# EAGLE board XPDR_Board_2 (EAGLE 7.2.0)
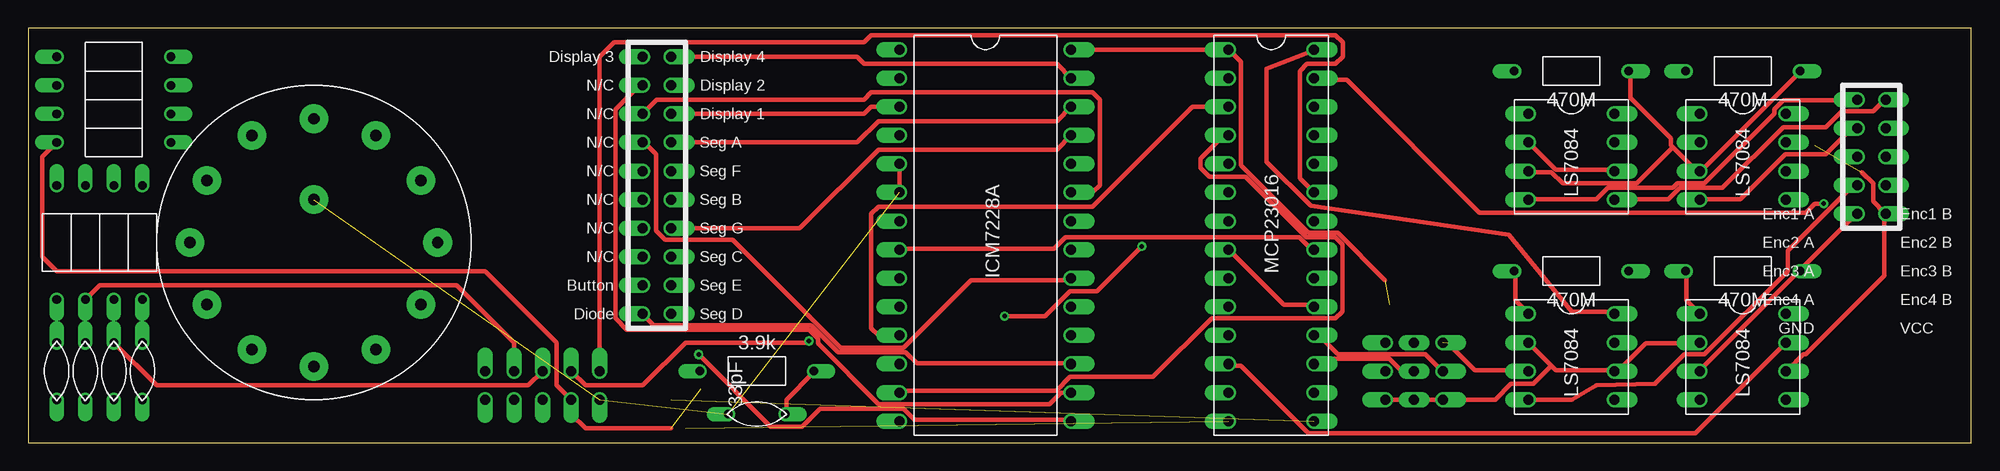
[diagram p0: board, top side]
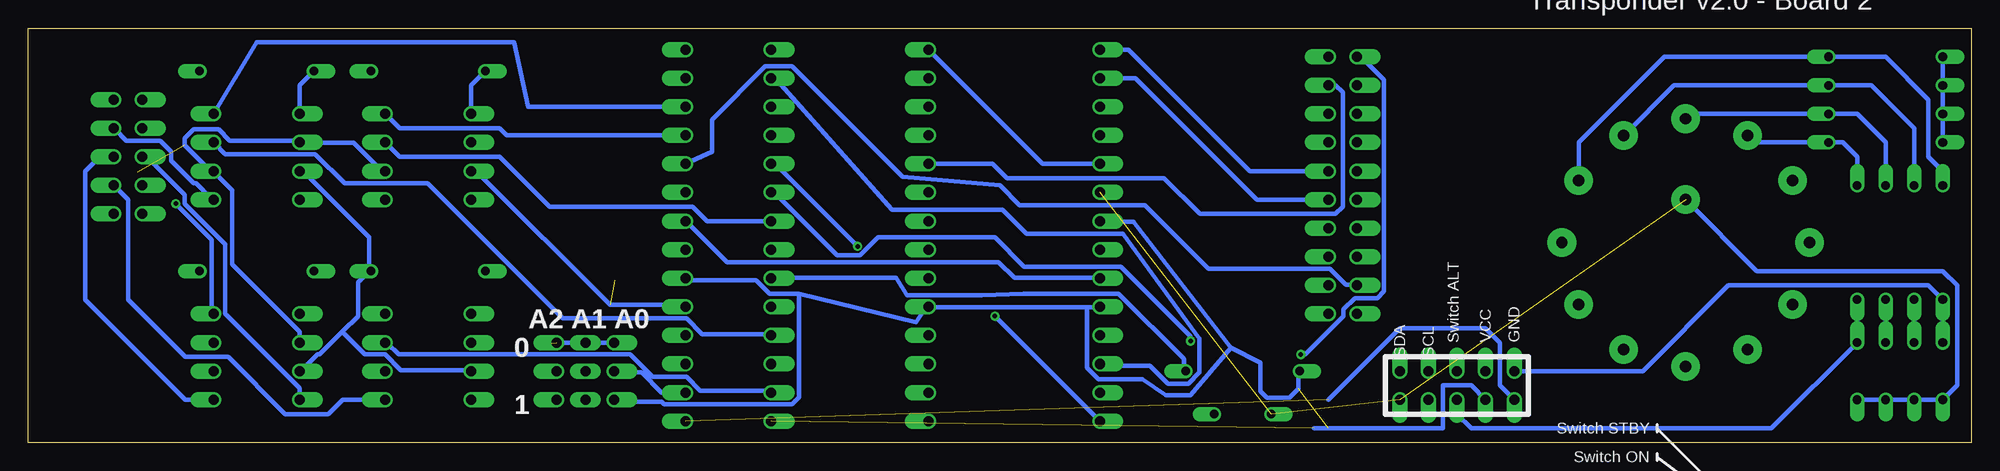
[diagram p1: board, bottom side, seen from below]

Size 172.72 x 36.83 mm. Coordinates in mm from the lower left corner, seen from the top.
Outline: 0,36.83 0,0 172.72,0 172.72,36.83 0,36.83
Copper layers (1*16): Top 0.035mm / dielectric 1.5mm / Bottom 0.035mm
Design rules "RadioStack_v2": minimum track width 0.2mm, minimum drill 0.4mm, track to track 0.2mm, track to pad 0.2mm, pad to pad 0.2mm, via to via 0.2mm, smd to smd 0.2mm, copper to edge 0.5mm, drill to drill 8mil, minimum pad ring 10mil, minimum via ring 8mil, stop-mask expansion 4mil, vias tented up to drill 0mil, thermal gap 10mil

## Footprints (pad centres in the part's own frame; a part is rotated, then mirrored left to right if it is on the bottom)
LS7084 = drill 0.889 pad 1.27 offset: P$1 0,0; P$2 0,-2.54; P$3 0,-5.08; P$4 0,-7.62; P$5 7.62,-7.62; P$6 7.62,-5.08; P$7 7.62,-2.54; P$8 7.62,0
LISTA_2X5 = drill 0.889 pad 1.27 offset: 1 0,0; 2 0,-2.54; 3 0,-5.08; 4 0,-7.62; 5 0,-10.16; 6 2.54,-10.16; 7 2.54,-7.62; 8 2.54,-5.08; 9 2.54,-2.54; 10 2.54,0
ICM7228A = drill 0.889 pad 1.27 offset: P$1 0,0; P$2 0,-2.54 | drill 0.889 offset: P$3 0,-5.08; P$4 0,-7.62; P$5 0,-10.16; P$6 0,-12.7; P$7 0,-15.24; P$8 0,-17.78; P$9 0,-20.32; P$10 0,-22.86; P$11 0,-25.4; P$12 0,-27.94; P$13 0,-30.48; P$14 0,-33.02; P$15 15.24,-33.02; P$16 15.24,-30.48; P$17 15.24,-27.94; P$18 15.24,-25.4; P$19 15.24,-22.86; P$20 15.24,-20.32; P$21 15.24,-17.78; P$22 15.24,-15.24; P$23 15.24,-12.7; P$24 15.24,-10.16; P$25 15.24,-7.62; P$26 15.24,-5.08; P$27 15.24,-2.54; P$28 15.24,0
LISTA_2X10 = drill 0.889 pad 1.27 offset: 1 0,0; 2 0,-2.54; 3 0,-5.08; 4 0,-7.62; 5 0,-10.16; 6 0,-12.7; 7 0,-15.24; 8 0,-17.78; 9 0,-20.32; 10 0,-22.86; 11 2.54,-22.86; 12 2.54,-20.32; 13 2.54,-17.78; 14 2.54,-15.24; 15 2.54,-12.7; 16 2.54,-10.16; 17 2.54,-7.62; 18 2.54,-5.08; 19 2.54,-2.54; 20 2.54,0
REZISTOR = drill 0.762 pad 1.27 offset: P$1 -5.08,0; P$2 5.08,0
MCP23016 = drill 0.889 pad 1.27 offset: A0 7.62,-30.48; A1 7.62,-27.94; A2 7.62,-25.4; CLK 0,-20.32; GP0.0 7.62,-17.78; GP0.1 7.62,-15.24; GP0.2 7.62,-12.7; GP0.3 7.62,-10.16; GP0.4 7.62,-7.62; GP0.5 7.62,-5.08; GP0.6 7.62,-2.54; GP0.7 7.62,0; GP1.0 0,-2.54; GP1.1 0,-5.08; GP1.2 0,-7.62; GP1.3 0,-10.16; GP1.4 0,-15.24; GP1.5 0,-25.4; GP1.6 0,-27.94; GP1.7 0,-30.48; SCL 0,-33.02; SDA 7.62,-33.02; TP 0,-22.86; VDD 7.62,-20.32; VSS1 0,0; VSS2 0,-17.78; VSS3 7.62,-22.86; ~INT 0,-12.7
ADRESA_0..2 = drill 0.889 pad 1.27 offset: P$1 0,0; P$2 0,-2.54; P$3 0,-5.08; P$7 5.08,0; P$8 5.08,-2.54; P$9 5.08,-5.08 | drill 0.889 pad 1.27 long: P$4 2.54,-5.08; P$5 2.54,-2.54; P$6 2.54,0
KONDENZATOR = drill 0.762 pad 1.27 offset: P$1 -2.54,0; P$2 2.54,0
ROTARY_SWITCH = drill 1.016 pad 2.54: 1 5.5,9.5; 2 9.5,5.5; 3 11,0; 4 9.5,-5.5; 5 5.5,-9.5; 6 0,-11; 7 -5.5,-9.5; 8 -9.5,-5.5; 9 -11,0; 10 -9.5,5.5; 11 -5.5,9.5; 12 0,11; A 0,3.81

## Placement (x,y rotation side)
U$1  LS7084  [LS7084]  133.35,29.21 0 top
U$2  LS7084  [LS7084]  148.59,29.21 0 top
U$3  LS7084  [LS7084]  148.59,11.43 0 top
U$4  LS7084  [LS7084]  133.35,11.43 0 top
U$5  LISTA_2X5  [LISTA_2X5]  50.8,3.81 90 bottom
U$6  ICM7228A  [ICM7228A]  77.47,34.92 0 top
U$7  LISTA_2X10  [LISTA_2X10]  54.61,34.29 0 top
U$8  470M  [REZISTOR]  137.16,33.02 180 top
U$9  MCP23016  [MCP23016]  106.68,34.92 0 top
U$10  470M  [REZISTOR]  152.4,33.02 180 top
U$11  ADRESA_0..2  [ADRESA_0..2]  125.73,3.81 180 top
U$12  470M  [REZISTOR]  152.4,15.24 180 top
U$13  470M  [REZISTOR]  137.16,15.24 180 top
U$14  3.9k  [REZISTOR]  64.77,6.35 0 top
U$15  33pF  [KONDENZATOR]  64.77,2.54 180 top
U$16  ROTARY_SWITCH  [ROTARY_SWITCH]  25.4,17.78 0 top
U$17  [REZISTOR]  7.62,26.67 0 top
U$18  [REZISTOR]  7.62,29.21 0 top
U$19  [REZISTOR]  7.62,31.75 0 top
U$20  [REZISTOR]  7.62,34.29 0 top
U$21  [REZISTOR]  10.16,17.78 90 top
U$22  [REZISTOR]  7.62,17.78 90 top
U$23  [REZISTOR]  5.08,17.78 90 top
U$24  [REZISTOR]  2.54,17.78 90 top
U$25  KONDENZATOR  [KONDENZATOR]  2.54,6.35 90 top
U$26  KONDENZATOR  [KONDENZATOR]  5.08,6.35 90 top
U$27  LISTA_2X5  [LISTA_2X5]  162.56,30.48 0 top
U$28  KONDENZATOR  [KONDENZATOR]  7.62,6.35 90 top
U$29  KONDENZATOR  [KONDENZATOR]  10.16,6.35 90 top

## Library data of the parts
U$1-U$29 = RadioStack_v2

## Nets
GND: U$1.P$3 U$2.P$3 U$3.P$3 U$4.P$3 U$5.1 U$6.P$5 U$6.P$6 U$6.P$28 U$8.P$1 U$9.VSS1 U$9.VSS2 U$9.VSS3 U$10.P$1 U$11.P$3 U$11.P$4 U$11.P$9 U$12.P$1 U$13.P$1 U$15.P$2 U$16.A U$25.P$1 U$26.P$1 U$27.5 U$28.P$1 U$29.P$1
N$1: U$6.P$27 U$7.20
N$2: U$6.P$24 U$7.19
N$3: U$6.P$3 U$7.18
N$4: U$6.P$26 U$7.17
N$5: U$6.P$1 U$7.16
N$6: U$6.P$2 U$7.15
N$7: U$6.P$25 U$7.14
N$8: U$6.P$15 U$7.1
N$9: U$6.P$16 U$7.2
N$10: U$6.P$23 U$7.3
N$11: U$6.P$20 U$7.4
N$12: U$1.P$2 U$1.P$6 U$2.P$2 U$2.P$6 U$3.P$2 U$3.P$6 U$4.P$2 U$4.P$6 U$5.2 U$6.P$7 U$6.P$10 U$6.P$19 U$9.VDD U$11.P$1 U$11.P$6 U$11.P$7 U$14.P$1 U$17.P$1 U$18.P$1 U$19.P$1 U$20.P$1 U$27.6
N$13: U$6.P$12 U$9.GP1.0
N$14: U$1.P$8 U$9.GP0.4
N$15: U$2.P$8 U$9.GP0.5
N$16: U$1.P$1 U$8.P$2
N$17: U$2.P$1 U$10.P$2
N$18: U$3.P$1 U$12.P$2
N$19: U$4.P$1 U$13.P$2
N$20: U$6.P$11 U$9.GP1.1
N$21: U$3.P$8 U$9.GP0.6
N$22: U$4.P$8 U$9.GP0.7
N$23: U$1.P$7 U$9.GP1.4
N$24: U$1.P$4 U$27.1
N$25: U$1.P$5 U$27.10
N$26: U$2.P$4 U$27.2
N$27: U$2.P$5 U$27.9
N$28: U$3.P$4 U$27.3
N$29: U$3.P$5 U$27.8
N$30: U$4.P$4 U$27.4
N$31: U$4.P$5 U$27.7
N$32: U$2.P$7 U$9.GP1.5
N$33: U$3.P$7 U$9.GP1.6
N$34: U$4.P$7 U$9.GP1.7
N$35: U$9.A0 U$11.P$8
N$36: U$9.A1 U$11.P$5
N$37: U$9.A2 U$11.P$2
N$38: U$6.P$13 U$9.GP1.2
N$39: U$6.P$14 U$9.GP1.3
N$40: U$16.11 U$17.P$2 U$21.P$2
N$41: U$6.P$8 U$9.GP0.0
N$42: U$6.P$9 U$9.GP0.1
N$43: U$16.12 U$18.P$2 U$22.P$2
N$44: U$5.4 U$9.SCL
N$45: U$5.5 U$9.SDA
N$46: U$5.9 U$9.~INT
N$47: U$5.10 U$9.GP0.2
N$48: U$9.CLK U$14.P$2 U$15.P$1
N$49: U$7.9 U$9.GP0.3
N$50: U$6.P$17 U$7.10
N$51: U$16.1 U$19.P$2 U$23.P$2
N$52: U$16.2 U$20.P$2 U$24.P$2
N$54: U$5.7 U$23.P$1 U$26.P$2
N$55: U$5.8 U$22.P$1 U$28.P$2
N$56: U$5.3 U$21.P$1 U$29.P$2
N$59: U$5.6 U$24.P$1 U$25.P$2

## Tracks (layer width: path | path; a pad name or v marks a point on that pad's centre or on a via)
GND  (5 unrouted)
  Top 0.406: 126.2,8.83 128.6,6.43 133.2,6.43 U$4.P$3 | U$9.VSS3 114.2,12.23 111.6,12.23 106.8,17.03 U$9.VSS2 | U$27.5 162.4,20.23 157.6,15.43 U$12.P$1 157.4,15.23 148.6,6.43 U$3.P$3 | 146.2,26.23 148.4,24.03 U$2.P$3 148.6,24.03 157.4,32.83 U$10.P$1 | 146.2,26.23 146,26.43 146,27.03 142.4,30.63 142.4,32.83 U$8.P$1 | 146.2,26.23 143,23.03 136.4,23.03 135.4,24.03 133.4,24.03 U$1.P$3 | 120.6,14.43 116.4,18.63 113.8,18.63 107.8,24.63 107.8,33.83 106.8,34.83 U$9.VSS1 U$6.P$28 | U$6.P$6 U$6.P$5
  Bottom 0.406: U$29.P$1 U$28.P$1 U$26.P$1 U$25.P$1 1.27,5.08 1.27,13.97 2.54,15.24 19.05,15.24 U$16.A | U$2.P$3 148.4,24.23 142.4,18.23 142.4,15.43 U$13.P$1 142.4,15.23 143.4,14.23 143.4,11.23 144.8,9.83 | 144.8,9.83 146.8,7.83 147,7.83 148.4,6.43 U$3.P$3 | U$9.VSS3 114.4,12.23 121,12.23 132.8,24.03 133.2,24.03 U$1.P$3 | 144.8,9.83 142.8,7.83 141,7.83 139.6,6.43 133.4,6.43 U$4.P$3 | U$6.P$5 82.55,24.77 U$6.P$28 | U$11.P$9 U$11.P$4 U$11.P$3
N$1
  Top 0.406: U$7.20 73.66,34.29 74.3,33.66 91.44,33.66 U$6.P$27
N$2
  Bottom 0.406: U$7.19 56.52,31.75 55.88,31.11 55.88,20.95 56.52,20.32 68.58,20.32 71.75,23.49 85.72,23.49 87,24.77 U$6.P$24
N$3
  Top 0.406: U$7.18 74.3,29.21 74.93,29.84 U$6.P$3
N$4
  Top 0.406: U$7.17 73.66,26.67 75.56,28.57 91.44,28.57 U$6.P$26
N$5
  Bottom 0.406: U$7.16 64.14,24.13 74.93,34.92 U$6.P$1
N$6
  Bottom 0.406: U$7.15 63.5,21.59 74.3,32.38 U$6.P$2
N$7
  Top 0.406: U$7.14 68.58,19.05 75.56,26.03 91.44,26.03 U$6.P$25
N$8  (via drill 0.4)
  Top 0.406: v59.6,7.83 66,1.43 68.8,1.43 70.4,3.03 77.8,3.03 78.8,2.03 92.6,2.03 U$6.P$15
  Bottom 0.406: v59.6,7.83 59.2,7.83 55.8,11.23 55.8,11.83 54.8,12.83 52.8,12.83 52.2,13.43 52.2,32.23 54.2,34.23 54.6,34.23 U$7.1
N$9
  Top 0.406: U$6.P$16 92.6,4.43 91.8,4.43 90.8,3.43 75.6,3.43 70.2,8.83 70.2,9.23 69.4,10.03 53.2,10.03 52.2,11.03 52.2,29.63 54.2,31.63 54.6,31.63 U$7.2
N$10
  Top 0.406: U$7.3 55.88,30.48 74.3,30.48 74.93,31.11 94.61,31.11 95.25,30.48 95.25,22.86 94.61,22.22 U$6.P$23
N$11
  Top 0.406: U$6.P$20 92.6,14.43 83.8,14.43 77.8,8.43 72.2,8.43 62.6,18.03 56.6,18.03 55.8,18.83 55.8,25.63 54.8,26.63 U$7.4
N$12  (2 unrouted)
  Top 0.406: U$11.P$7 120.8,3.83 123,3.83 U$11.P$6 123.2,3.83 125.6,3.83 U$11.P$1 125.8,3.83 130.4,3.83 131.8,5.23 133.8,5.23 135.4,6.83 | 135.4,6.83 133.4,8.83 U$4.P$2 | 135.4,6.83 135.8,6.43 140.8,6.43 U$4.P$6 141,6.43 141.4,6.43 143.8,8.83 148.4,8.83 U$3.P$2 | U$1.P$6 140.8,24.23 135.8,24.23 133.4,26.63 U$1.P$2 | U$3.P$6 156.4,6.43 157.8,7.83 158,7.83 165,14.83 165,20.23 U$27.6 165,20.43 164,21.43 164,23.03 163,24.03 | 156.4,24.03 U$2.P$6 | U$17.P$1 1.27,25.4 1.27,16.51 2.54,15.24 40.64,15.24 46.99,8.89 46.99,5.08 U$5.2 48.26,2.54 49.53,1.27 57.15,1.27
  Bottom 0.406: U$20.P$1 U$19.P$1 U$18.P$1 U$17.P$1 | U$1.P$6 141,24.23 141.4,24.23 143.8,26.63 148.4,26.63 U$2.P$2 148.6,26.83 154.8,26.83 155.8,27.83 158,27.83 158.8,27.03 158.8,26.43 156.4,24.03 U$2.P$6 156.2,24.03 154.6,22.43 154.6,15.83 148.6,9.83 148.6,9.03 U$3.P$2 | 78.6,12.03 92.6,12.03 U$6.P$19 92.8,12.23 93.8,10.69 104.2,13.23 | 78.6,12.03 77.6,12.03 U$6.P$10 | 104.2,13.23 106.8,13.23 108,14.43 114.2,14.43 U$9.VDD | 65.8,8.43 63.2,7.1 63.2,4.57 62.6,3.97 60.6,3.97 59.8,4.77 59.8,6.23 U$14.P$1 | 65.8,8.43 74.46,19.63 77.4,19.63 U$6.P$7 | 78.6,12.03 78.6,6.63 77.6,5.63 73.67,5.63 71.6,4.2 69.4,4.2 65.8,8.43 | 104.2,13.23 104.2,4.03 104.8,3.43 116.2,3.43 116.4,3.63 120.6,3.63 U$11.P$7
N$13
  Bottom 0.406: U$6.P$12 77.4,6.83 73,6.83 71.4,5.23 69.6,5.23 68.6,6.23 68.6,9.23 75.4,18.57 84,18.57 86.12,20.69 95.93,20.69 106.2,32.23 106.6,32.23 U$9.GP1.0
N$14
  Bottom 0.406: U$9.GP0.4 130.18,27.3 130.81,27.94 139.7,27.94 U$1.P$8
N$15
  Bottom 0.406: U$9.GP0.5 128.27,29.84 129.54,35.56 152.4,35.56 U$2.P$8
N$16
  Bottom 0.406: U$1.P$1 133.35,31.75 U$8.P$2
N$17
  Bottom 0.406: U$2.P$1 148.59,31.75 U$10.P$2
N$18
  Top 0.406: U$12.P$2 147.4,15.23 147.4,12.63 148.4,11.63 U$3.P$1
N$19
  Top 0.406: U$13.P$2 132.2,15.23 132.2,12.63 133.2,11.63 U$4.P$1
N$20
  Top 0.406: U$6.P$11 75.56,9.52 74.93,10.16 74.93,20.32 75.56,20.95 94.61,20.95 103.5,29.84 U$9.GP1.1
N$21  (via drill 0.4)
  Top 0.406: v159.6,21.23 158.8,21.23 158,20.43 129,20.43 117.2,32.23 114.4,32.23 U$9.GP0.6
  Bottom 0.406: v159.6,21.23 156.4,18.03 156.4,11.63 U$3.P$8
N$22
  Top 0.406: U$4.P$8 140.8,11.63 137.2,11.63 131.61,18.49 114,21.03 110.06,24.97 110.06,33.23 114.2,34.83 U$9.GP0.7
N$23
  Bottom 0.406: U$9.GP1.4 112.39,19.68 113.67,20.95 126.36,20.95 130.81,25.4 139.7,25.4 U$1.P$7
N$24
  Top 0.406: U$1.P$4 133.4,21.63 139.4,21.63 140.4,22.63 146.2,22.63 146.6,23.03 149,23.03 155.2,29.23 155.2,29.63 156,30.43 162.4,30.43 U$27.1
N$25
  Top 0.406: U$1.P$5 141,21.63 145.8,21.63 146.8,22.63 150.6,22.63 156,28.03 159.8,28.03 161.2,29.43 164,29.43 165,30.43 U$27.10
N$26
  Top 0.406: U$2.P$4 148.6,21.63 152.2,21.63 156.2,25.63 159.8,25.63 162,27.83 162.4,27.83 U$27.2
N$27
  Bottom 0.406: U$2.P$5 156.4,21.63 157.8,23.03 158,23.03 160,25.03 160,25.83 161,26.83 164,26.83 165,27.83 U$27.9
N$28
  Bottom 0.406: U$3.P$4 148.6,3.83 148.6,4.83 155.2,11.43 155.2,17.63 158.8,21.23 158.8,22.03 162,25.23 162.4,25.23 U$27.3
N$29
  Bottom 0.406: U$3.P$5 158.75,3.81 167.64,12.7 167.64,24.13 166.37,25.4 U$27.8
N$30
  Top 0.406: U$4.P$4 137.21,3.83 139.4,5.1 144.61,5.23 144.6,5.23 147.2,7.83 149,7.83 156.4,15.23 156.4,17.03 162.4,23.03 U$27.4
N$31
  Bottom 0.406: U$4.P$5 144.78,3.81 146.05,2.54 149.86,2.54 154.94,7.62 158.75,7.62 163.83,12.7 163.83,21.59 U$27.7
N$32
  Bottom 0.406: U$9.GP1.5 106.8,9.63 112.8,9.63 114.2,11.03 125.2,11.03 137.2,23.03 144.6,23.03 147.2,25.63 155.2,25.63 156.2,26.63 U$2.P$7
N$33
  Top 0.406: U$9.GP1.6 106.8,6.83 107.8,6.83 113.8,0.83 148.2,0.83 156.2,8.83 U$3.P$7
N$34
  Bottom 0.406: U$9.GP1.7 106.8,4.63 113,4.63 114.2,5.83 117.2,5.83 119.2,7.83 139.8,7.83 140.8,8.83 U$4.P$7
N$35
  Bottom 0.406: U$9.A0 116.2,4.45 116.4,4.43 118.2,6.23 120.6,6.23 U$11.P$8
N$36
  Top 0.406: U$11.P$5 123,6.43 122,6.43 121,7.43 114.8,7.43 114.4,7.03 U$9.A1
N$37
  Top 0.406: U$11.P$2 125.6,6.43 124.2,7.83 116.4,7.83 114.8,9.43 114.4,9.43 U$9.A2
N$38
  Top 0.406: U$6.P$13 77.6,4.63 91.4,4.63 92.6,5.83 100,5.83 105.2,11.03 116.2,11.03 116.8,11.63 116.8,17.63 116.2,18.23 113.6,18.23 108.2,23.63 105,23.63 104.2,24.43 104.2,25.23 106.2,27.23 106.6,27.23 U$9.GP1.2
N$39  (via drill 0.4)
  Top 0.406: v86.8,11.23 90.4,11.23 92.6,13.43 95,13.43 v99,17.43
  Bottom 0.406: v86.8,11.23 77.6,2.03 U$6.P$14 | v99,17.43 106.2,24.63 106.6,24.63 U$9.GP1.3
N$40
  Bottom 0.406: U$16.11 19.29,26.67 U$17.P$2 11.43,26.67 10.16,25.4 U$21.P$2
N$41
  Top 0.406: U$6.P$8 77.6,17.23 91.2,17.23 92.2,18.23 113,18.23 114.2,17.03 U$9.GP0.0
N$42
  Bottom 0.406: U$6.P$9 77.6,14.63 85.07,14.63 86.47,16.03 110.6,16.03 114.2,19.63 U$9.GP0.1
N$43
  Bottom 0.406: U$16.12 24.97,29.21 U$18.P$2 10.16,29.21 7.62,26.67 U$22.P$2
N$44  (1 unrouted)
  Bottom 0.406: U$5.4 44.45,5.08 46.99,5.08 46.99,1.27 58.42,1.27
N$45  (1 unrouted)
  Bottom 0.406: U$5.5 41.91,5.08 41.91,8.89 43.18,10.16 50.8,10.16 57.15,3.81
N$46  (via drill 0.4)
  Top 0.406: v69.4,9.03 69.26,8.89 58.42,8.89 54.61,5.08 49.53,5.08 U$5.9
  Bottom 0.406: v69.4,9.03 69.4,9.43 75.6,15.63 84.2,15.63 86.8,18.23 97.2,18.23 98.8,16.63 100.8,16.63 106.2,22.03 106.6,22.03 U$9.~INT
N$47
  Top 0.406: U$5.10 50.8,34.29 52.07,35.56 74.3,35.56 74.93,36.2 116.2,36.2 116.84,35.56 116.84,34.29 116.2,33.66 113.67,33.66 113.03,33.02 113.03,23.49 U$9.GP0.2
N$48
  Top 0.406: U$15.P$1 67.4,2.63 67.4,3.83 69.8,6.23 U$14.P$2
  Bottom 0.406: U$9.CLK 106.6,14.63 95.6,14.63 94.6,13.09 87.94,13.09 84.27,13.23 75.8,13.23 70,7.43 70,6.43 U$14.P$2
N$49
  Bottom 0.406: U$7.9 54.8,14.03 55.6,14.03 57,15.43 67.8,15.43 73.46,21.09 84.59,21.09 86.36,22.86 95,23.63 104.8,33.43 107.2,33.43 111.93,28.7 111.93,25.83 114.2,24.83 U$9.GP0.3
N$50
  Top 0.406: U$6.P$17 92.6,7.03 79,7.03 78,8.03 72,8.03 69.6,10.43 55.6,10.43 54.8,11.23 U$7.10
N$51
  Bottom 0.406: U$16.1 26.43,31.75 U$19.P$2 8.89,31.75 5.08,27.94 U$23.P$2
N$52
  Bottom 0.406: U$16.2 34.9,26.7 27.3,34.29 U$20.P$2 7.62,34.29 3.81,30.48 3.81,25.4 2.54,24.13 U$24.P$2
N$54
  Top 0.406: U$5.7 43.18,8.89 38.1,13.97 6.35,13.97 U$23.P$1
  Bottom 0.406: U$26.P$2 U$23.P$1
N$55
  Top 0.406: U$5.8 44.45,5.08 11.43,5.08 U$28.P$2
  Bottom 0.406: U$28.P$2 U$22.P$1
N$56
  Bottom 0.406: U$21.P$1 U$29.P$2 17.78,1.27 44.45,1.27 45.72,2.54 U$5.3
N$57
  cutout Bottom (isolate 1.016): 0.64,36.2 172.09,36.2 172.09,0.63 0.64,0.63
N$58
  cutout Top (isolate 1.016): 0.64,36.2 172.09,36.2 172.09,0.63 0.64,0.63
N$59
  Bottom 0.406: U$25.P$2 U$24.P$1 3.81,13.97 21.59,13.97 29.21,6.35 U$5.6

## Text on the board
tPlace: Display 3 | Display 4 | N/C | Display 2 | N/C | Display 1 | N/C | Seg A | N/C | Seg F | N/C | Seg B | Enc1 A | Enc1 B | N/C | Seg G | Enc2 A | Enc2 B | N/C | Seg C | Enc3 A | Enc3 B | Button | Seg E | Enc4 A | Enc4 B | Diode | Seg D | GND | VCC
bPlace: Transponder v2.0 - Board 2 | A0 | A1 | A2 | GND | VCC | Switch ALT | SCL | SDA | 0 | 1 | Switch STBY | Switch ON | INT | LATCH RST | Switch TEST